# Altium PCB SSFocuser-A-DRV8825.PcbDoc
Units mil, origin at the board's own origin, x right, y up, seen from the top; angles counter-clockwise.
Board outline 2355 x 1575 mil, 2 copper layers (Top Layer, Bottom Layer); 62 components, 49 nets, 266 pads, 131 vias.
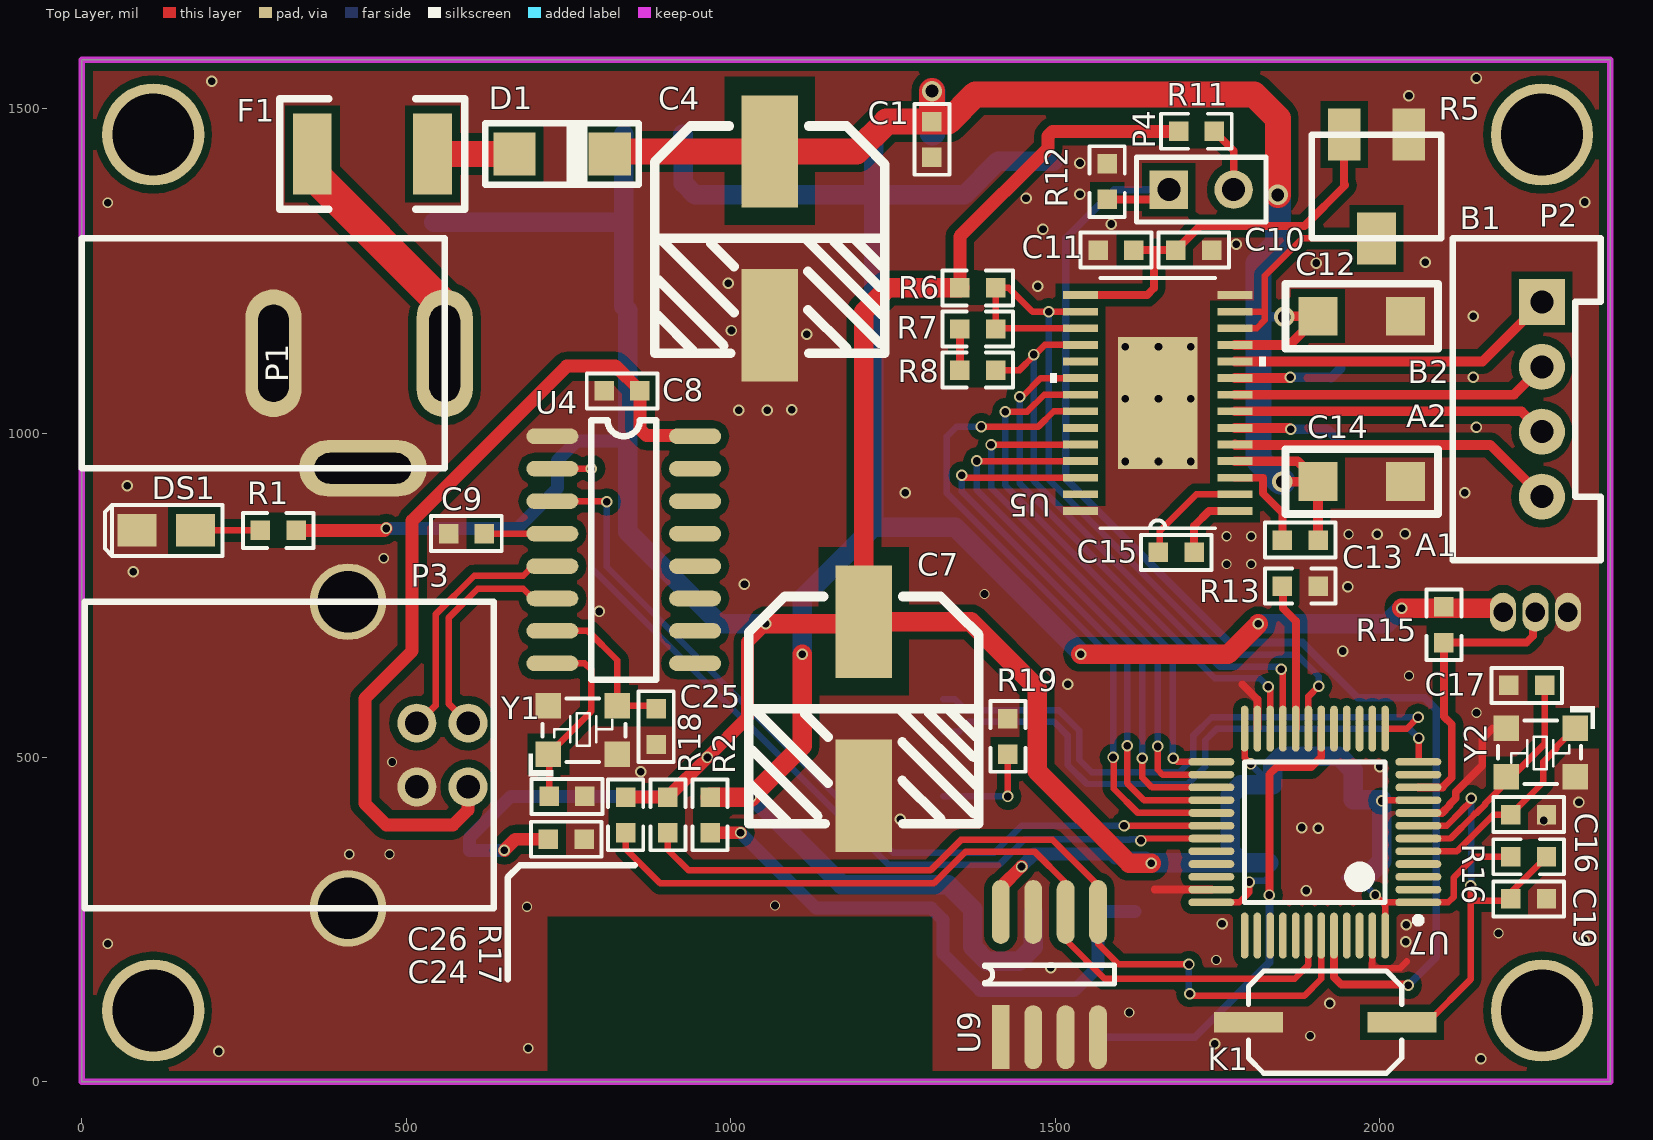
[diagram p0: Top Layer view]
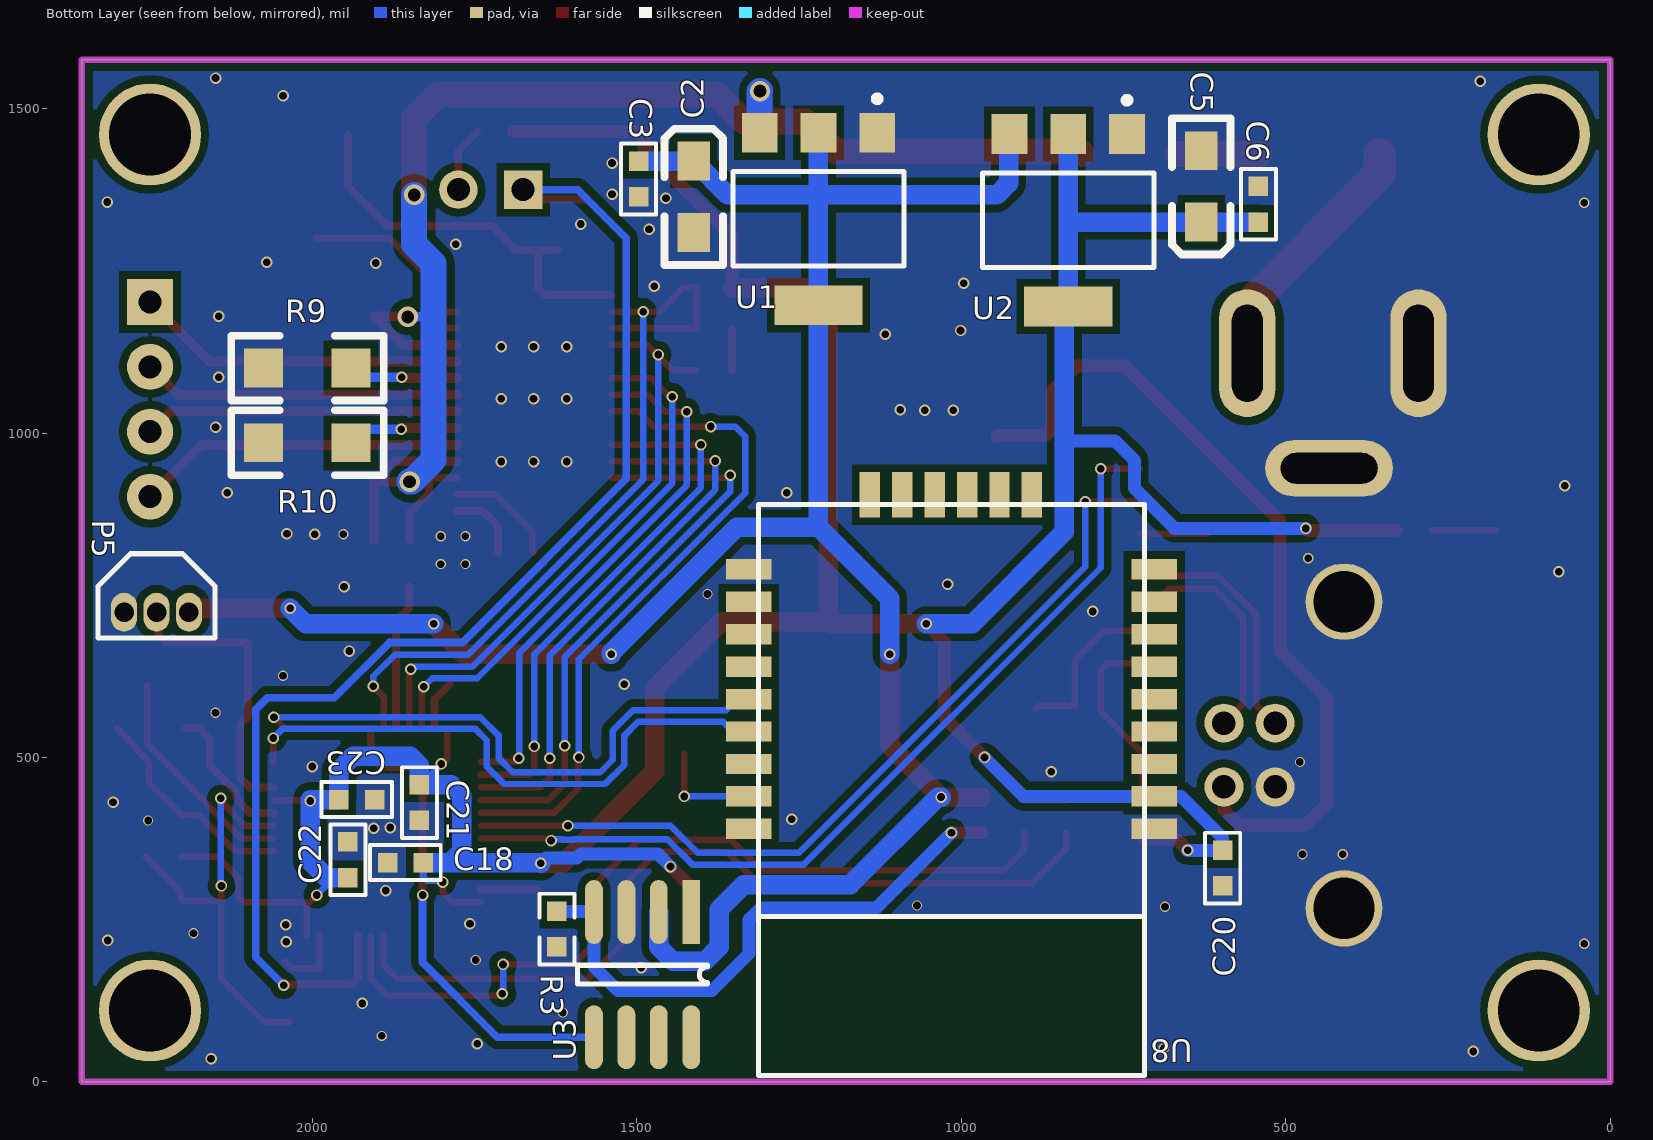
[diagram p1: Bottom Layer view, seen from below]

## Layer stack, top to bottom
Top Solder: solder mask 0.4, Solder Resist, Dk 3.5
Top Layer: signal copper 1.4
Dielectric1: dielectric 12.6, FR-4, Dk 4.8
Bottom Layer: signal copper 1.4
Bottom Solder: solder mask 0.4, Solder Resist, Dk 3.5

## Board outline
0,0 2355,0 2355,1575 0,1575

## Design rules (kind name [scope] priority, off if disabled: settings)
Clearance Clearance_pyog [InPolygon] p1: gap=12
Clearance Clearance_mcu [InComponentClass('U7')] p2: gap=7
Clearance [All] p3: gap=7
HoleSize [All] p1: absolutevalues=TRUE maxlimit=1000 minlimit=1 maxpercent=80.000 minpercent=20.000
MinimumSolderMaskSliver [All] p1: minsoldermaskwidth=0
PolygonConnect [All] p1: connectstyle=Direct reliefconductorwidth=10 reliefentries=4 polygonreliefangle="90 Angle" airgapwidth=10
RoutingVias [All] p1: holewidth=28 width=50 viastyle="Through Hole" minholewidth=11.81 minwidth=17.72 maxholewidth=28 maxwidth=50
SilkToSilkClearance [All] p1: silktosilkclearance=0
SilkToSolderMaskClearance [IsPad] p1: minsilkscreentomaskgap=0 clearancetoexposedcopper=TRUE
SolderMaskExpansion [All] p1: expansion=4
Width [All] p1: maxlimit=50 minlimit=10 preferedwidth=10
25 further rules are at their usual default settings.

## Components (designator, comment, footprint, x,y, rotation, side; value= is the part's Value field where it differs from the comment)
C1 "100nF" 0603C 1310,1425 r90 top locked
C2 "10uF" 3216 1412,1419 r90 bottom locked
C3 "100nF" 0603C 1497,1364 r90 bottom locked
C4 "470UF/16V" 16V/470U(CD10X10D5) 1060,1300 r270 top locked
C5 "10uF" 3216 630,1325 r270 bottom locked
C6 "100nF" 0603C 542,1380 r270 bottom locked
C7 "1000uF" 16V/470U(CD10X10D5) 1205,575 r270 top locked
C8 "100nF" 0603C 805,1065 r0 top locked
C9 "100nF" 0603C 565,845 r0 top locked
C10 "100nF" 0603C 1741,1282 r180 top locked
C11 "0.47uF" 0603C 1566,1282 r0 top locked
C12 "4.7uF" 1206C 1905,1180 r0 top locked
C13 "100nF" 0603C 1905,835 r180 top locked
C14 "4.7uF" 1206C 1905,925 r0 top locked
C15 "10nF" 0603C 1659,816 r0 top locked
C16 "20pF" 0603C 2202,412 r0 top locked
C17 "20pF" 0603C 2254,611 r180 top locked
C18 "100nF" 0603C 1884,338 r180 bottom locked
C19 "100nF" 0603C 2257,282 r180 top locked
C20 "100nF" 0603C 597,302 r90 bottom locked
C21 "100nF" 0603C 1835,403 r90 bottom locked
C22 "100nF" 0603C 1945,370 r270 bottom locked
C23 "100nF" 0603C 1904,435 r0 bottom locked
C24 "100nF" 0603C 774,374 r180 top locked
C25 "20p" 0603C 885,575 r270 top locked
C26 "20p" 0603C 720,440 r0 top locked
D1 "M7" DO-214AC 740,1430 r0 top locked
DS1 "LED1" 0805D 130,850 r180 top locked
F1 "MSMD350-6V 3A" 1812R 540,1430 r180 top locked
K1 "GJLCONN 4*6*2.5MM" SW-4*6 2034,13.26 r180 top
P1 "SOURCE" DC_5.5MM 0,1300 r0 top locked
P2 "Header 4" XH_4_V 2250,1202 r270 top locked
P3 "USB-B" USB-B 595.04,454.57 r0 top locked
P4 "BOOT0" HDR1X2 1675,1375 r0 top locked
P5 "DS18B20" TO-92B 2190,724 r0 bottom
R1 "102" 0603R 275,850 r0 top locked
R2 "4.7K" 0603R 968,384 r90 top locked
R3 "2K" 0603R 1623,263 r270 bottom
R5 "RPot" VR_SMD 1995,1380 r180 top locked
R6 "1.5K" 0603R 1353,1223.67 r0 top locked
R7 "10K" 0603R 1353,1160.33 r0 top locked
R8 "1.5K" 0603R 1353,1097 r0 top locked
R9 "0.1Ω" 1206R 2075,1100 r180 bottom locked
R10 "0.1Ω" 1206R 2075,985 r180 bottom locked
R11 "5K" 0603R 1745,1465 r180 top locked
R12 "10K" 0603R 1580,1360 r90 top locked
R13 "10K" 0603R 1905,764 r180 top locked
R15 "4.7K" 0603R 2099,677 r90 top locked
R16 "10K" 0603R 2257,347 r180 top locked
R17 "4.7k" 0603R 838,384 r90 top locked
R18 "4.7k" 0603R 903,384 r90 top locked
R19 "10K" 0603R 1427,505 r90 top locked
U1 "AMS1117-5.0" SOT223 1220,1330 r0 bottom locked
U2 "AMS1117-3.3" SOT223 835,1327.87 r0 bottom locked
U3 "MAX813LCSA" SOP-8 1416,261.91 r270 bottom
U4 "CH340G" SO-16 725,995 r0 top locked
U5 "DRV8825" HTSSOP 1658,1046.25 r180 top locked
U7 "STM32F103C8T6" LQFP48_N 1900,385 r90 top locked
U8 "B-0006" B-0006 1015,450 r0 bottom locked
U9 "AT24C02BN-SH-T" SOP-8 1416,69.09 r90 top
Y1 "12MHz  无源" X3225 720,504 r0 top locked
Y2 "8MHz  无源" X3225 2300,546 r180 top locked

## Footprints (in the part's own frame and the unit in brackets; to place one, negate y for a bottom-side part, rotate by r counter-clockwise, add the part's x,y. Pads: shape width x height; smd on the part's side, far side on the other; paste and mask are expansions set on the pad)
16V/470U(CD10X10D5) [mm] "取自《FE-3AD》"
  rect 4.4x2.2 smd: 1(-3.4,0) 2(3.4,0)
  Top Layer pour cut-out: -6.35,1.778 -0.508,1.778 -0.508,-1.778 -6.35,-1.778
  silkscreen extent -4.4,-4.5 4.5,4.5
0603C [mil]
  rect 30x30 smd: 1(0,0) 2(55,0)
  silkscreen extent -27,-27 82,27, body extent -4,-16 58,16, height 12
0603R [mil]
  rect 30x30 smd: 1(0,0) 2(55,0)
  silkscreen extent -27,-27 82,27, body extent -4,-18 58,16, height 18
0805D [mil]
  rect 60x50 smd: 1(-45,0) 2(45,0)
  silkscreen extent -87,-39 95,39, body extent -63,-32 63,31, height 42
1206C [mil]
  rect 60x60 smd: 1(0,0) 2(135,0)
  silkscreen extent -50,-50 185,50, body extent 6,-33 132,30, height 40
1206R [mil]
  rect 60x60 smd: 1(0,0) 2(135,0)
  silkscreen extent -50,-50 185,50, body extent 5,-32 131,30, height 22
1812R [mil]
  rect 60x125 smd: 1(0,0) 2(185,0)
  silkscreen extent -50,-85 235,85, body extent 4,-63 182,63, height 64
3216 [mil]
  rect 60x50 smd: 1(0,0) 2(-110,0)
  silkscreen extent -160,-45 50,45, body extent -151,-35 38,36, height 73
B-0006 [mil]
  rect 70x31.5 smd: 1(-312.5,60) 2(-312.5,10) 3(-312.5,-40) 4(-312.5,-90) 5(-312.5,-140) 6(-312.5,-190) 7(-312.5,-240) 8(-312.5,-290) 9(-312.5,-340) 16(312.5,-340) 17(312.5,-290) 18(312.5,-240) 19(312.5,-190) 20(312.5,-140) 21(312.5,-90) 22(312.5,-40) 23(312.5,10) 24(312.5,60)
  rect 31.5x70 smd: 10(-124.04,-455) 11(-74.04,-455) 12(-24.04,-455) 13(25.96,-455) 14(75.96,-455) 15(125.96,-455)
  Top Layer pour cut-out: -298,439 -298,195 297,195 298,196 298,439
  silkscreen extent -298,-440 298,440
DC_5.5MM [mm]
  oval 2.2x5 hole 1.2 slot 3.8 at 90 deg: 1(14.2,-4.5) 2(7.5,-4.5)
  oval 5x2.2 hole 1.2 slot 3.8 at 0 deg: 3(11,-9)
  silkscreen extent 0,-9 14.2,0, body extent -0.1,-8.88 14.1,-0.12, height 10.82
DO-214AC [mm]
  rect 1.655x1.67 smd: 1(1.865,0) 2(-1.865,0)
  silkscreen extent -3,-1.2 3,1.2, body extent -2.74,-1.4 2.74,1.4, height 2.3
HDR1X2 [mm] "Connector; Header; 2 Position"
  rect 1.5x1.5 hole 0.9: 1(0,0)
  round 1.5 hole 0.9: 2(2.54,0)
  silkscreen extent -1.27,-1.27 3.81,1.27, body extent -1.27,-1.27 3.81,1.27, height 7.58
HTSSOP [mil]
  rect 54x12 smd: 1(-119,166.34) 2(-119,140.75) 3(-119,115.16) 4(-119,89.57) 5(-119,63.98) 6(-119,38.39) 7(-119,12.8) 8(-119,-12.8) 9(-119,-38.39) 10(-119,-63.98) 11(-119,-89.57) 12(-119,-115.16) 13(-119,-140.75) 14(-119,-166.34) 15(119,-166.34) 16(119,-140.75) 17(119,-115.16) 18(119,-89.57) 19(119,-63.98) 20(119,-38.39) 21(119,-12.8) 22(119,12.8) 23(119,38.39) 24(119,63.98) 25(119,89.57) 26(119,115.16) 27(119,140.75) 28(119,166.34)
  rect 122.05x203.94 smd: 29(0,0)
  silkscreen extent -166,-193 166,193, body extent -133,-191 120,191, height 40
LQFP48_N [mm]
  oval 0.3x1.8 smd: 1(-2.75,-4.05) 2(-2.25,-4.05) 3(-1.75,-4.05) 4(-1.25,-4.05) 5(-0.75,-4.05) 6(-0.25,-4.05) 7(0.25,-4.05) 8(0.75,-4.05) 9(1.25,-4.05) 10(1.75,-4.05) 11(2.25,-4.05) 12(2.75,-4.05) 25(2.75,4.05) 26(2.25,4.05) 27(1.75,4.05) 28(1.25,4.05) 29(0.75,4.05) 30(0.25,4.05) 31(-0.25,4.05) 32(-0.75,4.05) 33(-1.25,4.05) 34(-1.75,4.05) 35(-2.25,4.05) 36(-2.75,4.05)
  oval 1.8x0.3 smd: 13(4.05,-2.75) 14(4.05,-2.25) 15(4.05,-1.75) 16(4.05,-1.25) 17(4.05,-0.75) 18(4.05,-0.25) 19(4.05,0.25) 20(4.05,0.75) 21(4.05,1.25) 22(4.05,1.75) 23(4.05,2.25) 24(4.05,2.75) 37(-4.05,2.75) 38(-4.05,2.25) 39(-4.05,1.75) 40(-4.05,1.25) 41(-4.05,0.75) 42(-4.05,0.25) 43(-4.05,-0.25) 44(-4.05,-0.75) 45(-4.05,-1.25) 46(-4.05,-1.75) 47(-4.05,-2.25) 48(-4.05,-2.75)
  silkscreen extent -3.57,-4.18 2.75,2.75, body extent -4.5,-4.5 4.5,4.5, height 1.5
SO-16 [mil]
  oval 80x24 smd: 1(0,0) 2(0,-50) 3(0,-100) 4(0,-150) 5(0,-200) 6(0,-250) 7(0,-300) 8(0,-350) 9(220,-350) 10(220,-300) 11(220,-250) 12(220,-200) 13(220,-150) 14(220,-100) 15(220,-50) 16(220,0)
  silkscreen extent 60,-375 160,25, body extent -12,-377 226,29, height 77
SOP-8 [mm]
  rect 2.5x0.7 smd: 1(0,0)
  oval 2.5x0.7 smd: 2(0,-1.27) 3(0,-2.54) 4(0,-3.81) 5(4.9,-3.81) 6(4.9,-2.54) 7(4.9,-1.27) 8(4.9,0)
  silkscreen extent 2.08,-4.45 2.82,0.63, body extent -0.56,-4.44 5.48,0.58, height 1.6
SOT223 [mm] "SOT-223/SC-73; 4 Leads; Body 6.7 x 7.3 mm, inc. leads (LxW max)"
  rect 1.4x1.55 smd: 1(-2.3,-3.375) 2(0,-3.375) 3(2.3,-3.375)
  rect 3.45x1.55 smd: 4(0,3.375)
  silkscreen extent -3.35,-4.82 3.35,1.85, body extent -3.25,-3.53 3.25,3.43, height 1.7
SW-4*6 [mm] "SWITCH"
  rect 2.7x0.8 smd: 1(0,-2) 2(6,-2)
  silkscreen extent 0,-4 6,0
TO-92B [mil]
  oval 40x60 hole 30: 1(0,0) 2(50,0) 3(100,0)
  silkscreen extent -40,-90 140,40
USB-B [mm]
  round 1.524 hole 0.92: 1(0,0) 2(0,2.5) 3(-2,2.5) 4(-2,0)
  round 3 hole 2.4: 5(-4.7,7.25) 6(-4.7,-4.75)
  silkscreen extent -15,-4.75 1,7.25
VR_SMD [mil]
  rect 50x80 smd: 1(-50,-80) 2(50,-80)
  rect 60x80 smd: 3(0,80)
  silkscreen extent -100,-80 100,80
X3225 [mil]
  rect 39.37x39.37 smd: 1(-1,1) 2(105,1) 3(105,76) 4(-1,76)
  silkscreen extent -32,-33 118,87, body extent -9,-11 117,87, height 28
XH_4_V [mm]
  rect 1.8x1.8 hole 0.9: 1(0,0)
  round 1.8 hole 0.9: 2(2.54,0) 3(5.08,0) 4(7.62,0)
  silkscreen extent -2.5,-3.5 10.12,2.3, body extent -2.39,-3.35 10.01,2.75, height 7

## Part data
C1 C3 C6 C8 C10 C11 C12 C13 C14 C15 C16 C17 C18 C19 C20 C21 C22 C23 C24 C25 C26: library part Cap, "Capacitor"
C2 C5 C7: library part CAP2
C4: library part C470UF016S, "470UF      16V      CD10X10D5"
C9: library part C
D1: library part Diode, "High Conductance Fast Diode"
DS1: library part LED2, "Typical RED, GREEN, YELLOW, AMBER GaAs LED"
F1: library part FUSE2, "Fuse"
K1: library part KEY2, "Switch"
P2: "Header, 4-Pin"
P4: library part MHDR1X2, "Header, 2-Pin"
P5: library part "Header 3", "Header, 3-Pin"
R1 R2 R3 R9 R10 R12 R15 R16 R17 R18: library part RES, "Resistor"
R5: "Potentiometer"
R6 R7 R8 R11 R13 R19: library part R
U1 U2: library part AMS1117
U3: library part MAX813L
U4: "USB2UART"
U7: "STM32 ARM-based 32-bit MCU Performance Line with 64 kB Flash, 20 kB Internal RAM, -40 to +85癈 Temperature, 48-Pin LQFP, Tray"
U9: library part 24C256
Y1: library part XTAL_3225
Y2: library part XTAL_1, "Crystal Oscillator"

## Free pads (board coordinates)
  round 157.48 hole 125.98: 0(110,110) 1(2250,110) 2(2250,1460) 3(110,1460)

## Via types
v1: diameter 17.72, hole 11.81, Top Layer to Bottom Layer, 105 vias
v2: diameter 15.75, hole 11.81, Top Layer to Bottom Layer, 22 vias
v3: diameter 31.5, hole 19.68, Top Layer to Bottom Layer, 4 vias

## Nets (pads, with @x,y where several pads share a name; then routed paths per layer and width w, separated by ;. In a path a pad name is that pad's centre, name@x,y a point inside that pad or via, vN(x,y) a via of type N, cw(c..) or ccw(c..) an arc to the next point about the centre after c; other vN are vias at no path point)
A1: P2.4 U5.5 | length 506.2
  Top Layer w15: U5.5 1777.63,981.64 2170.36,981.64 P2.4
A2: P2.3 U5.7 | length 486
  Top Layer w15: U5.7 2218.55,1033.45 P2.3
B1: P2.1 U5.10 | length 511
  Top Layer w15: U5.10 1777.13,1110.36 2158.36,1110.36 P2.1
B2: P2.2 U5.8 | length 490.8
  Top Layer w15: U5.8 2207.05,1059.05 P2.2
BOOT0: P4.1 R12.1 U7.44 | length 2006.6
  Top Layer w12: R12.1 1660,1360 P4.1 ; U7.44 1929.53,161.47 1941,150 2043,150 v1(2044,149)
  Bottom Layer w12: P4.1 1591,1375 1516,1300 1516,929.43 1768.43,677 1881,677 1966,592 2069,592 2087,574 2087,192 v1(2044,149)
BOOT1: R13.2 U7.20 | length 228.4
  Top Layer w12: R13.2 1851,763 1851,730 1870.86,710.14 1870.86,544.83 U7.20
BRX: U7.12 U8.21 | length 906.4
  Top Layer w10: U7.12 2060,493.82 v1(2060,530)
  Bottom Layer w10: U8.21 1352,540 1367,555 1498,555 1519,534 1519,489 1548.86,459.14 1704.14,459.14 1731,486 1731,526.54 1748.46,544 2046,544 v1(2060,530)
BTX: U7.13 U8.20 | length 918.2
  Top Layer w10: U7.13 2041.45,544.45 v1(2059,562)
  Bottom Layer w10: U8.20 1345,590 1362,573 1505.46,573 1537,541.46 1537,496.46 1556.31,477.14 1691.05,477.14 1713,499.09 1713,534 1741,562 v1(2059,562)
D3V3: C5.1 C6.2 C7.1 C18.2 C20.2 C21.2 C22.2 C23.2 C24.2 R1.2 R6.1 R11.2 R16.2 R17.2 R18.2 U2.2 U2.4 U7.1 U7.9 U7.24 U7.36 U7.48 U8.2 U9.8 | length 6425.8
  Top Layer w10: U7.36 1783.73,276.73 1799,292 v1(1799,308) ; U7.24 1791.73,499.27 v1(1801,490) ; v1(1993,288) 2004.27,276.73 ; v1(2003,433) 2004.21,434.21 U7.9 ; U7.48 2008.27,272.73 2004.27,276.73 ; R16.2 2146,347 2114,315 2114,285 2105.73,276.73 U7.1 2004.27,276.73
  Top Layer w20: R1.2 466,850 v1(469,853) ; v1(651,357) 668,374 C24.2 ; R17.2 R18.2 v1(964,500) 1026,562 1026,678 v1(1054,706) ; R6.1 1353,1303 1489,1439 1489,1458 1496,1465 R11.2 ; U9.8 1416,300 v1(1448,332)
  Top Layer w30: v1(1054,706) 1202.14,706 C7.1 ; R6.1 1241.67,1223.67 1205,1187 C7.1 ; v1(1648,337) 1614,337 1472,479 1472,607 1370.14,708.86 C7.1
  Bottom Layer w10: v1(1799,308) 1800.86,309.86 1822.86,309.86 1829,316 C18.2 ; v1(1801,490) 1833,458 C21.2 ; C22.2 1966,315 v1(1993,288)
  Bottom Layer w20: v1(469,853) 671,853 733,915 733,958 763,988 838.86,988 840.86,990 ; v1(651,357) C20.2 597,376 661,440 U8.2 904,440 v1(964,500) ; v1(1448,332) 1467,351 1586.56,351 1592.42,345.14 1639.86,345.14 v1(1648,337)
  Bottom Layer w30: C6.2 C5.1 834,1325 835,1326 ; U2.2 835,1326 ; v1(1054,706) 983,706 840.86,848.14 840.86,990 840.86,1189.14 U2.4 835,1326 ; v1(1648,337) 1649,338 1787,338 ; C18.2 1787,338 ; C21.2@1833,458 1786,458 1770,442 1770,355 1787,338 ; C21.2 1835,488 1849,502 1937,502 1959,480 C23.2 2003,435 v1(2003,433) 2003,340 1978,315 1966,315
D5V0: C2.1 C3.2 P5.1 R2.2 R15.2 U1.2 U1.4 U2.3 U3.2 | length 3562
  Top Layer w30: R2.2 v1(1031,439) 1110,518 v1(1110,659) ; v1(1539,659) 1766,659 v1(1813,706) ; v1(2034,730) 2184,730 P5.1
  Bottom Layer w30: U2.3 927,1459.3 927,1385 945,1367 1220,1367 ; v1(1031,439) 1036,439 1171,304 1335,304 1373,266 1373,208 1395,186 1444,186 1466,208 U3.2 ; v1(1110,659) 1110,745 1220,855 ; U1.2 1220,1367 ; C3.2 C2.1 1360,1367 1220,1367 ; v1(1539,659) 1539,661.78 1345.77,855 1220,855 ; v1(1813,706) 2010,706 v1(2034,730) ; 1220,855 U1.4 1220,1367
D12V0: C1.2 C4.1 C12.1 C13.1 C14.1 D1.1 U1.3 U5.4 U5.11 | length 2308.7
  Top Layer w15: U5.4 1873.32,956.68 C14.1 ; U5.11 1860.82,1135.82 C12.1 1854,1180 v3(1853,1179) ; v3(1850,925) C14.1 ; C13.1 C14.1
  Top Layer w40: D1.1 817.28,1433.86 C4.1 1193.86,1433.86 1240,1480 C1.2 ; v3(1310,1527) C1.2 ; v3(1843,1367) 1843,1485 1806,1522 1377,1522 1335,1480 C1.2
  Bottom Layer w15: 1813,1179 v3(1853,1179)
  Bottom Layer w40: v3(1310,1527) 1310.55,1526.45 U1.3 ; v3(1843,1367) 1843,1291 1813,1261 1813,1179 1813,959 1847,925 v3(1850,925)
DIR: U5.20 U7.22 | length 818
  Top Layer w10: v1(1445,1056) 1449,1056 1477.64,1084.64 U5.20 ; v1(1828,609) 1831.1,605.9 U7.22
  Bottom Layer w10: v1(1445,1056) 1445,922.65 1745.65,622 1815,622 v1(1828,609)
EN: U5.21 U7.25 | length 829
  Top Layer w10: v1(1423,1033) 1457,1033 1483.05,1059.05 U5.21 ; v1(1682,499) 1687.73,493.27 U7.25
  Bottom Layer w10: v1(1423,1033) 1423,919.2 1681,661.2 1681,500 v1(1682,499)
FLT: R8.2 U5.18 U7.21 | length 937
  Top Layer w10: R8.2 1445,1097 1467,1119 v1(1467,1121) 1469,1121 1483.82,1135.82 U5.18 ; v1(1848,636) 1850.79,633.21 U7.21
  Bottom Layer w10: v1(1467,1121) 1467,926.11 1753.11,640 1844,640 v1(1848,636)
GND: C1.1 C2.2 C3.1 C4.2 C5.2 C6.1 C7.2 C8.1 C9.1 C10.1 C11.1 C12.2 C14.2 C16.2 C17.2 C18.1 C19.1 C20.1 C21.1 C22.1 C23.1 C24.1 C25.2 C26.2 DS1.2 K1.2 P1.2 P1.3 P3.4 P3.5 P3.6 P5.3 R3.2 R5.1 R9.1 R10.1 R12.2 R13.1 R19.2 U1.1 U2.1 U3.3 U4.1 U5.14 U5.28 U5.29 U7.8 U7.23 U7.35 U7.47 U8.1 U8.16 U9.1 U9.2 U9.3 U9.4 U9.7 Y1.2 Y1.4 Y2.2 Y2.4 | length 493.7
  Top Layer w10: U7.47 1988.58,175.42 2031.42,175.42 2042,186
  Top Layer w12: 1653.42,296.42 U7.35 ; 1788,613 1811.42,589.58 U7.23 ; U7.8 2096.03,414.53 2107.88,426.38 2107.88,427.88 2117.14,437.14 2117.14,446.73 2158,487.59 2158,529 2174,545 Y2.2
  other v1: 2156,36 211,47 1746,59 1923,121 1493,176 2040,216 2315,218 2041,242 1757,244 1887,295 1905,391 1880,392 1261,405 2307,431 861,478 2000,486 1519,613 1943,664 797,725 1951,763 1021,767 79,786 1996,844 2039,845 1269,908 2131,908 70,919 1608,956 1659,956 1709,956 2149,1009 1012,1035 1056,1035 1094,1036 1608,1053 1659,1053 1709,1053 2144,1086 1608,1133 1659,1133 1709,1133 1117,1152 1001,1158 2144,1180 1473,1226 996,1231 1902,1262 2070,1263 1779,1291 1481,1314 1586,1322 2316,1356 1455,1362 1538,1368 1538,1416 2045,1520 200,1542 2149,1547
  other v2: 688,52 1893,71 1614,107 1748,188 40,213 2183,229 686,270 1068,272 412,351 474,351 2253,403 478,493 2149,569 2045,626 1391,752 1764,798 1802,798 465,807 1764,841 1802,841 1952,844 40,1355
M0: U5.24 U7.26 | length 831.2
  Top Layer w10: v1(1401,982) 1538.73,982 U5.24 ; v1(1658,517) 1658,481 1665.42,473.58 U7.26
  Bottom Layer w10: v1(1401,982) 1401,915.74 1658,658.74 v1(1658,517)
M1: U5.25 U7.27 | length 866.6
  Top Layer w10: v1(1379,957) 1379.32,956.68 U5.25 ; v1(1634,499) 1634,469 1649.1,453.9 U7.27
  Bottom Layer w10: v1(1379,957) 1379,912.28 1634,657.28 v1(1634,499)
M2: U5.26 U7.28 | length 905.5
  Top Layer w10: v1(1356,935) 1359.91,931.09 U5.26 ; v1(1611,518) 1611,460 1636.79,434.21 U7.28
  Bottom Layer w10: v1(1356,935) 1356,909.83 1611,654.83 v1(1611,518)
NetC9_2: C9.2 U4.4 | length 105
  Top Layer w10: C9.2 U4.4
NetC13_2: C13.2 U5.3 | length 151.5
  Top Layer w12: U5.3 1819.91,931.09 1819.91,907.09 1850,877 C13.2
NetC15_1: C15.1 U5.2 | length 173.2
  Top Layer w10: C15.1 1661,818 1661,849 1717.5,905.5 U5.2
NetC15_2: C15.2 U5.1 | length 113.5
  Top Layer w12: C15.2 1714,857 1736.91,879.91 U5.1
NetC25_1: C25.1 U4.7 Y1.3 | length 250.7
  Top Layer w10: U4.7 780,695 825,650 Y1.3 880,580 C25.1
NetC26_1: C26.1 U4.8 Y1.1 | length 286.9
  Top Layer w10: C26.1 720,504 Y1.1 785,571 785,635 775,645 U4.8
NetD1_1: D1.2 F1.1 | length 126.6
  Top Layer w40: F1.1 D1.2
NetDS1_1: DS1.1 R1.1 | length 100
  Top Layer w10: DS1.1 R1.1
NetF1_2: F1.2 P1.1 | length 391.7
  Top Layer w50: F1.2 355,1400 559.06,1195.94 P1.1
NetP3_2: P3.2 U4.6 | length 359.3
  Top Layer w10: P3.2 565,583.03 565,715 610,760 680,760 695,745 U4.6
NetP3_3: P3.3 U4.5 | length 391.2
  Top Layer w10: P3.3 517.99,552.99 545,580 545,720.46 604.54,780 680,780 695,795 U4.5
NetP4_2: P4.2 R11.1 | length 102.4
  Top Layer w12: R11.1 1775,1435 P4.2
NetR2_1: R2.1 R3.1 U3.4 | length 887.2
  Top Layer w20: R2.1@969,385 R2.1 v1(1015,384)
  Bottom Layer w20: v1(1015,384) 1131,268 1309,268 1327,250 1327,198 1384,141 1529,141 1566,178 U3.4 1567.09,263 R3.1
NetR5_3: R5.3 U5.12 U5.13 | length 361.7
  Top Layer w10: U5.12 1810.41,1161.41 1823,1174 1823,1188 ; U5.13 1822,1187 1823,1188 ; R5.3 1881,1300 1823,1242 1823,1188
NetR7_1: R7.1 R8.1 | length 63.3
  Top Layer w12: R8.1 R7.1
NetR9_2: R9.2 U5.9 | length 170.8
  Top Layer w15: U5.9 1861.64,1084.64 1862,1085 v1(1862,1086)
  Bottom Layer w15: v1(1862,1086) 1924,1086 1925,1085 R9.2
NetR10_2: R10.2 U5.6 | length 172.5
  Top Layer w15: U5.6 1861.14,1007.86 v1(1863,1006)
  Bottom Layer w15: v1(1863,1006) 1919,1006 R10.2
NetR19_1: R19.1 U8.23 | length 164.5
  Top Layer w10: v1(1427,440) R19.1
  Bottom Layer w10: U8.23 v1(1427,440)
OSC_IN: C16.1 U7.5 Y2.1 | length 340
  Top Layer w10: U7.5 2119.02,355.47 2175.54,412 C16.1 2252,462 2252,493.18 2272,513.18 2272,516 Y2.1
OSC_OUT: C17.1 U7.6 Y2.3 | length 346.3
  Top Layer w10: U7.6 2108.98,375.16 2144.88,411.06 2144.88,411.51 2148.51,415.14 2150.05,415.14 2162.86,427.95 2162.86,429.49 2254,520.63 C17.1
PFO: U3.5 U7.18 | length 736.2
  Top Layer w12: v1(1830,288) 1830,474 1841,485 1894,485 1909.84,500.84 U7.18
  Bottom Layer w12: U3.5 1715,69 1830,184 v1(1830,288)
RESET: C19.2 K1.1 R16.1 U7.7 | length 665.4
  Top Layer w10: K1.1 2074,92 2140,158 2140,279 ; U7.7 2103.21,394.84 2126.88,418.51 2126.88,418.97 2141,433.09 v1(2141,437) ; v1(2140,302) 2140,279 ; R16.1 2202,292 C19.2 2199,279 2140,279
  Bottom Layer w10: v1(2140,302) 2141,303 v1(2141,437)
RXD: U4.3 U7.30 | length 1316.1
  Top Layer w10: U4.3 808,895 v1(809,894) ; v1(1606,395) 1606.16,394.84 U7.30
  Bottom Layer w10: v1(809,894) 809,794 1250,353 1406,353 1448,395 v1(1606,395)
SCL: R17.1 U7.42 U9.6 | length 1306.2
  Top Layer w10: R17.1 838,359 891,306 1313,306 1362,355 1468,355 1516,307 U9.6 1516,219 1575.86,159.14 1869.14,159.14 1890.16,180.16 U7.42
SDA: R18.1 U7.43 U9.5 | length 1320.9
  Top Layer w10: R18.1 903,358 935,326 1307.54,326 1354.54,373 1496,373 1566,303 U9.5 1566,213 1598,181 v1(1706,181) ; v1(1707,136) 1710,133 1884,133 1909.84,158.84 U7.43
  Bottom Layer w10: v1(1706,181) 1706,137 v1(1707,136)
SLP: R6.2 R7.2 U5.16 U5.17 U7.19 | length 1228.3
  Top Layer w10: U5.17 1409.08,1161.41 R7.2 R6.2 1428.33,1223.67 1465,1187 v1(1490,1187) U5.16 ; U7.19 1890.16,594.16 v1(1906,610)
  Bottom Layer w10: v1(1490,1187) 1490,928.56 1760.56,658 1873,658 1906,625 v1(1906,610)
STEP: U5.22 U7.29 | length 1037.6
  Top Layer w10: v1(1386,1010) 1474,1010 1497.45,1033.45 U5.22 ; v1(1589,500) 1589,499 1590,498 1590,452 1627.47,414.53 U7.29
  Bottom Layer w10: v1(1386,1010) 1348,1010 1333,995 1333,907.37 1589.14,651.23 1589.14,500.14 v1(1589,500)
TEMP: P5.2 R15.1 U7.10 | length 451.3
  Top Layer w12: U7.10 2097.14,453.9 2097.14,455.01 2111,468.87 2111,551 2099,563 R15.1 2226,677 2236,687 2236,720 P5.2
TXD: U4.2 U7.31 | length 1377.1
  Top Layer w10: U4.2 v1(785,945) ; v1(1632,372) 1635.16,375.16 U7.31
  Bottom Layer w10: v1(785,945) 785,792.54 1242.54,335 1414,335 1453,374 1596.09,374 1596.95,373.14 1615.05,373.14 1615.91,374 1631,374 1632,373 v1(1632,372)
V3.3_L: C10.2 C11.2 R5.2 U5.15 | length 622.4
  Top Layer w12: U5.15 1641.59,1212.59 1652,1223 1652,1279 1654,1281 ; C11.2 C10.2 1723,1319 1884,1319 1947,1382 1945,1384 R5.2
VBUS: C8.2 P3.1 U4.16 | length 1298.2
  Top Layer w20: P3.1 595.04,419.04 572,396 469,396 436,429 436,591 509,664 509,865 747,1103 822.46,1103 860,1065.46 C8.2 860,1006 870,996 944,996 U4.16
pads on no net: U3.1 U3.6 U3.7 U3.8 U4.9 U4.10 U4.11 U4.12 U4.13 U4.14 U4.15 U5.19 U5.23 U5.27 U7.2 U7.3 U7.4 U7.11 U7.14 U7.15 U7.16 U7.17 U7.32 U7.33 U7.34 U7.37 U7.38 U7.39 U7.40 U7.41 U7.45 U7.46 U8.3 U8.4 U8.5 U8.6 U8.7 U8.8 U8.9 U8.10 U8.11 U8.12 U8.13 U8.14 U8.15 U8.17 U8.18 U8.19 U8.22 U8.24

## Polygon pours and split planes (outlines as drawn)
GND on Top Layer "TOP-GND" (solid, remove dead copper, pour order 2): 0,0 2355,0 2355,1575 0,1575
GND on Bottom Layer "TOP-GND" (solid, remove dead copper, pour order 0): 0,0 2355,0 2355,1575 0,1575

## Keep-outs
Keep-Out Layer:
  the board outline again, w10

## Other copper
Top Layer:
  pour cut-out: 1312,11.5 1311,12.5 1311,255.5 716,255.5 717,254.5 717,11.5
  pour cut-out: 1982,203 1982,163 1977,158

## Silkscreen, mask and mechanical layers (free items; w line width, h text height)
Top Overlay:
  lines w10: 656,158 656,315 675,334 852,334
  text "B1" at 2123,1314 h35
  text "B2" at 2043,1077 h35
  text "A2" at 2041,1009 h35
  text "A1" at 2055,810 h35

## Dimensions
0,0 to 2355,0 on Top Overlay
2355,0 to 2355,1575 on Top Overlay